# Altium PCB board.PcbDoc (part 2 of 2)
Units mm, origin at the board's own origin, x right, y up, seen from the top; angles counter-clockwise.
Board outline 96 x 40 mm, 4 copper layers (Top Layer, Mid Layer 1, Mid Layer 2, Bottom Layer), stack 1.57 mm thick; 216 components, 116 nets, 657 pads, 150 vias.
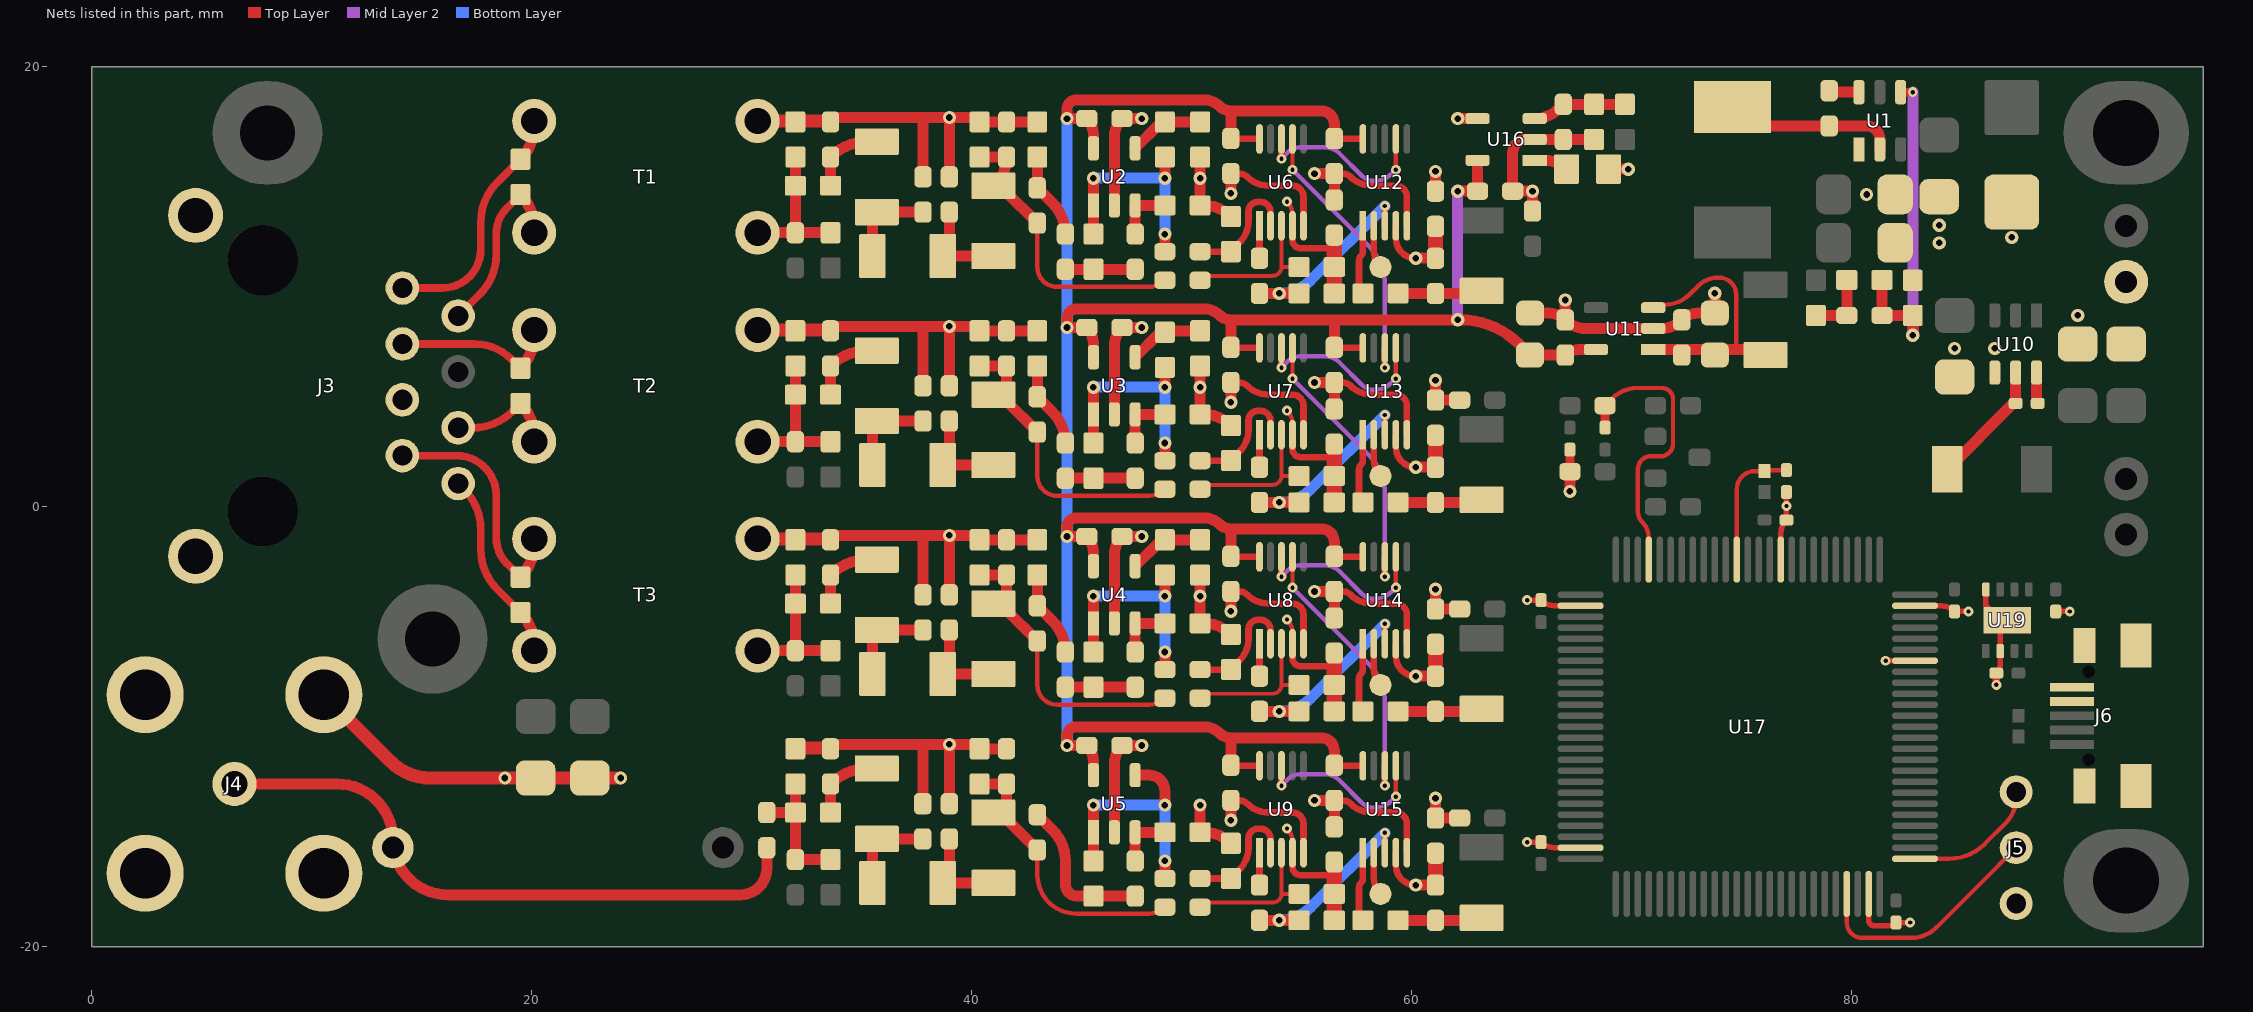
[diagram p4: the nets of this part, all layers, seen from the top]

## Via types
v1: diameter 0.6, hole 0.3, Top Layer to Bottom Layer, tented both sides, 81 vias
v2: diameter 0.45, hole 0.2, Top Layer to Bottom Layer, tented both sides, 69 vias

## Nets (pads, with @x,y where several pads share a name; then routed paths per layer and width w, separated by ;. In a path a pad name is that pad's centre, name@x,y a point inside that pad or via, vN(x,y) a via of type N, cw(c..) or ccw(c..) an arc to the next point about the centre after c; other vN are vias at no path point) (continued)
GND: C1.1 C2.1 C3.1 C11.1 C16.1 C44.1 C45.1 C46.1 C47.1 C52.2 C53.2 C54.2 C55.2 C56.1 C57.1 C58.1 C59.1 C60.1 C65.1 C66.1 C67.2 C68.2 C69.2 C70.2 C72.1 C73.1 C74.1 C75.1 C76.1 C77.1 C78.1 C79.1 C80.2 C85.2 C86.2 C87.2 C88.2 C89.1 C90.1 C91.1 C92.1 C94.1 C95.1 C96.1 C97.1 C100.1 C101.1 D1.1 J1.2 J3.5 J3.9 J3.10 J4.2 J5.3 J6.4 J6.5 J6.6 J6.7 J6.8 J6.9 L22.1 R14.2 R57.1 U1.1 U2.2 U3.2 U4.2 U5.2 U6.5 U7.5 U8.5 U9.5 U10.4 U11.2 U12.5 U13.5 U14.5 U15.5 U16.2 U17.10 U17.27 U17.49 U17.74 U17.94 U17.99 U19.2 U19.8 U19.9 | length 134.2
  Top Layer w0.25: v2(65.265,-15.242) C96.1@65.9,-15.242 ccw(c66.504,-14.638) 66.504,-15.492 U17.49@67.7,-15.492 ; v2(65.265,-4.242) C97.1@65.9,-4.242 ccw(c66.504,-3.638) 66.504,-4.492 U17.27@67.7,-4.492 ; U17.10@76.808,-2.4 76.808,-1.204 cw(c77.662,-1.204) C94.1@77.058,-0.601 v2(77.058,0.034) C101.1@77.058,0.669 ; U17.74@80.792,-17.6 80.792,-18.796 ccw(c81.038,-18.796) 81.038,-19.042 81.899,-19.042 ccw(c81.899,-18.9) C95.1@82.042,-18.9 v2(82.677,-18.9) ; v2(81.565,-7) U17.94@82.9,-7 ; U17.99@82.9,-4.508 84.096,-4.508 cw(c84.096,-5.362) C92.1@84.7,-4.758 v2(85.335,-4.758) ; U19.8@86.125,-3.758 86.125,-4.479 86.803,-5.158 U19.9@87.1,-5.158 ; C90.1@86.6,-7.558 ccw(c86.177,-7.136) 86.775,-7.136 U19.2@86.775,-6.558 U19.9@86.775,-5.483 ; C91.1@89.3,-4.758 v2(89.935,-4.758)
  Top Layer w0.3: C59.1@51.8,-13.35 52.186,-13.35 cw(c52.186,-13.847) 52.537,-13.496 ccw(c53.514,-12.519) 53.514,-13.9 54.603,-13.9 cw(c54.603,-14.397) 55.1,-14.397 U9.5@55.1,-15.725 ; C58.1@51.8,-3.85 52.186,-3.85 cw(c52.186,-4.347) 52.537,-3.996 ccw(c53.514,-3.019) 53.514,-4.4 54.603,-4.4 cw(c54.603,-4.897) 55.1,-4.897 U8.5@55.1,-6.225 ; C45.1@51.8,5.65 52.186,5.65 cw(c52.186,5.153) 52.537,5.504 ccw(c53.514,6.481) 53.514,5.1 54.603,5.1 cw(c54.603,4.603) 55.1,4.603 U7.5@55.1,3.275 ; C56.1@51.8,15.15 52.186,15.15 cw(c52.186,14.653) 52.537,15.004 ccw(c53.514,15.981) 53.514,14.6 54.603,14.6 cw(c54.603,14.103) 55.1,14.103 U6.5@55.1,12.775 ; C75.1@56.5,-13.35 56.886,-13.35 cw(c56.886,-13.847) 57.237,-13.496 ccw(c58.214,-12.519) 58.214,-13.9 59.303,-13.9 cw(c59.303,-14.397) 59.8,-14.397 U15.5@59.8,-15.725 ; C74.1@56.5,-3.85 56.886,-3.85 cw(c56.886,-4.347) 57.237,-3.996 ccw(c58.214,-3.019) 58.214,-4.4 59.303,-4.4 cw(c59.303,-4.897) 59.8,-4.897 U14.5@59.8,-6.225 ; C73.1@56.5,5.65 56.886,5.65 cw(c56.886,5.153) 57.237,5.504 ccw(c58.214,6.481) 58.214,5.1 59.303,5.1 cw(c59.303,4.603) 59.8,4.603 U13.5@59.8,3.275 ; C72.1@56.5,15.15 56.886,15.15 cw(c56.886,14.653) 57.237,15.004 ccw(c58.214,15.981) 58.214,14.6 59.303,14.6 cw(c59.303,14.103) 59.8,14.103 U12.5@59.8,12.775
  Top Layer w0.35: v2(86.6,-8.093) C90.1@86.6,-7.558
  Top Layer w0.4: C100.1@67.211,1.6 L22.1@67.211,2.6
  Top Layer w0.5: U5.2@46.5,-14.8 46.5,-11.696 cw(c47.696,-11.696) C47.1@46.85,-10.85 v1(47.75,-10.85) ; U4.2@46.5,-5.3 46.5,-2.196 cw(c47.696,-2.196) C46.1@46.85,-1.35 v1(47.75,-1.35) ; U3.2@46.5,4.2 46.5,7.304 cw(c47.696,7.304) C57.1@46.85,8.15 v1(47.75,8.15) ; U2.2@46.5,13.7 46.5,16.804 cw(c47.696,16.804) C44.1@46.85,17.65 v1(47.75,17.65) ; v1(51.8,-14.25) C59.1@51.8,-13.35 ; v1(51.8,-4.75) C58.1@51.8,-3.85 ; v1(51.8,4.75) C45.1@51.8,5.65 ; v1(51.8,14.25) C56.1@51.8,15.15 ; v1(55.6,-13.35) C75.1@56.5,-13.35 C55.2@56.5,-14.55 ; v1(55.6,-3.85) C74.1@56.5,-3.85 C54.2@56.5,-5.05 ; v1(55.6,5.65) C73.1@56.5,5.65 C53.2@56.5,4.45 ; v1(55.6,15.15) C72.1@56.5,15.15 C52.2@56.5,13.95 ; v1(61.1,-13.25) C70.2@61.1,-14.15 C88.2@62.2,-14.15 ; v1(61.1,-3.75) C69.2@61.1,-4.65 C87.2@62.2,-4.65 ; v1(61.1,5.75) C68.2@61.1,4.85 C86.2@62.2,4.85 ; C67.2@61.1,14.35 v1(61.1,15.25) ; C77.1@65.4,8.805 66.264,8.805 cw(c66.264,7.764) C79.1@67,8.5 ; C85.2@65.512,13.45 v1(65.512,14.35) C89.1@64.612,14.35 64.612,16.112 cw(c65.2,16.112) 65.2,16.7 U16.2@65.612,16.7 R57.1@68.312,16.7 ; v1(67,9.4) C79.1@67,8.5 ; v1(67.211,0.7) C100.1@67.211,1.6 ; v1(73.8,9.705) C65.1@73.8,8.805 73.036,8.805 ccw(c73.036,7.764) C66.1@72.3,8.5 cw(c71.334,9.466) 71.334,8.1 U11.2@71,8.1 67.966,8.1 cw(c67.966,9.466) C79.1@67,8.5
  Top Layer w0.6: J4.2@10.56,-8.54 13.603,-11.584 ccw(c15.399,-9.788) 15.399,-12.328 v1(18.793,-12.328) C3.1@20.193,-12.328 C2.1@22.153,-12.328 ; C2.1@22.652,-12.328 v1(24.052,-12.328)
  other v1: 84.7,7.2 86.528,7.2 90.3,8.7 84,12 87.3,12.25 84,12.8 80.7,14.2
NetC4_1: C4.1 C10.2 R7.2 R11.2 R18.2 | length 6.3
  Top Layer w0.5: C4.1@30.7,-13.9 R18.2@32,-13.9 ; R7.2@32,-12.6 R18.2@32,-13.9 ; R11.2@33.6,-16.04 C10.2@32,-16.04 R18.2@32,-13.9
NetC4_2: C4.2 J4.1 L1.2 | length 28.7
  Top Layer w0.5: J4.1@6.5,-12.6 11.16,-12.6 cw(c11.16,-15.14) 13.7,-15.14 ccw(c16.2,-15.14) 16.2,-17.64 29.5,-17.64 ccw(c29.5,-16.44) 30.7,-16.44 C4.2@30.7,-15.5
NetC5_1: C5.1 U1.6 | length 1.4
  Top Layer w0.5: C5.1@79,18.917 ccw(c79.067,18.917) 79.067,18.85 U1.6@80.35,18.85
NetC5_2: C5.2 L2.1 U1.2 | length 7.5
  Top Layer w0.5: L2.1@74.6,17.317 C5.2@79,17.317 80.7,17.317 cw(c80.7,16.717) 81.3,16.717 U1.2@81.3,16.25
NetC6_1: C6.1 R13.2 R14.1 U1.4 | length 15.4
  Top Layer w0.4: U1.4@82.25,18.85 v2@82.725,18.85
  Top Layer w0.5: R13.2@81.4,10.312 C6.1@81.4,8.7 R14.1@82.8,8.7 v1(82.8,7.8)
  Mid Layer 2 w0.5: v1(82.8,7.8) v2(82.8,18.85)
NetC6_2: C6.2 R12.2 R13.1 | length 3
  Top Layer w0.5: R12.2@78.4,8.7 C6.2@79.8,8.7 R13.1@79.8,10.312
NetC7_2: C7.2 R4.2 R8.2 R15.2 T1.4 | length 6.8
  Top Layer w0.5: T1.4@30.28,12.46 C7.2@32,12.46 ; R4.2@32,15.9 R15.2@32,14.6 C7.2@32,12.46 ; R8.2@33.6,12.46 C7.2@32,12.46
NetC8_2: C8.2 R5.2 R9.2 R16.2 T2.4 | length 6.8
  Top Layer w0.5: T2.4@30.28,2.96 C8.2@32,2.96 ; R5.2@32,6.4 R16.2@32,5.1 C8.2@32,2.96 ; R9.2@33.6,2.96 C8.2@32,2.96
NetC9_2: C9.2 R6.2 R10.2 R17.2 T3.4 | length 6.8
  Top Layer w0.5: T3.4@30.28,-6.54 C9.2@32,-6.54 ; R6.2@32,-3.1 R17.2@32,-4.4 C9.2@32,-6.54 ; R10.2@33.6,-6.54 C9.2@32,-6.54
NetC12_2: C12.2 L3.1 R15.1 | length 3.6
  Top Layer w0.5: R15.1@33.6,14.6 C12.2@33.6,15.9 cw(c35.29,14.21) 35.29,16.6 L3.1@35.7,16.6
NetC13_2: C13.2 L4.1 R16.1 | length 3.6
  Top Layer w0.5: R16.1@33.6,5.1 C13.2@33.6,6.4 cw(c35.29,4.71) 35.29,7.1 L4.1@35.7,7.1
NetC14_2: C14.2 L5.1 R17.1 | length 3.6
  Top Layer w0.5: R17.1@33.6,-4.4 C14.2@33.6,-3.1 cw(c35.29,-4.79) 35.29,-2.4 L5.1@35.7,-2.4
NetC15_2: C15.2 L6.1 R18.1 | length 3.6
  Top Layer w0.5: R18.1@33.6,-13.9 C15.2@33.6,-12.6 cw(c35.29,-14.29) 35.29,-11.9 L6.1@35.7,-11.9
NetC17_2: C17.2 L3.2 L7.1 | length 4.2
  Top Layer w0.5: L7.1@35.5,11.4 35.5,12.917 cw(c36.183,12.917) L3.2@35.7,13.4 C17.2@37.8,13.4
NetC18_2: C18.2 L4.2 L8.1 | length 4.2
  Top Layer w0.5: L8.1@35.5,1.9 35.5,3.417 cw(c36.183,3.417) L4.2@35.7,3.9 C18.2@37.8,3.9
NetC19_2: C19.2 L5.2 L9.1 | length 4.2
  Top Layer w0.5: L9.1@35.5,-7.6 35.5,-6.083 cw(c36.183,-6.083) L5.2@35.7,-5.6 C19.2@37.8,-5.6
NetC20_2: C20.2 L6.2 L10.1 | length 4.2
  Top Layer w0.5: L10.1@35.5,-17.1 35.5,-15.583 cw(c36.183,-15.583) L6.2@35.7,-15.1 C20.2@37.8,-15.1
NetC21_2: C21.2 L7.2 L11.1 | length 4.4
  Top Layer w0.5: C21.2@39,13.4 39,12.124 cw(c37.976,12.124) L7.2@38.7,11.4 L11.1@41,11.4
NetC22_2: C22.2 L8.2 L12.1 | length 4.4
  Top Layer w0.5: C22.2@39,3.9 39,2.624 cw(c37.976,2.624) L8.2@38.7,1.9 L12.1@41,1.9
NetC23_2: C23.2 L9.2 L13.1 | length 4.4
  Top Layer w0.5: C23.2@39,-5.6 39,-6.876 cw(c37.976,-6.876) L9.2@38.7,-7.6 L13.1@41,-7.6
NetC24_2: C24.2 L10.2 L14.1 | length 4.4
  Top Layer w0.5: C24.2@39,-15.1 39,-16.376 cw(c37.976,-16.376) L10.2@38.7,-17.1 L14.1@41,-17.1
NetC25_2: C25.2 C29.2 C30.2 L11.2 R19.2 | length 13.6
  Top Layer w0.2: C30.2@43,12.9 43,10.9 ccw(c43.9,10.9) 43.9,10 48.076,10 ccw(c48.076,11.024) C29.2@48.8,10.3
  Top Layer w0.5: R19.2@40.375,15.9 C25.2@41.6,15.9 41.6,15.873 cw(c39.974,15.873) L11.2@41.124,14.724 ; L11.2@41,14.6 cw(c41,13.876) L11.2@41.512,14.388 ; L11.2@41.512,14.388 C30.2@43,12.9
NetC26_2: C26.2 C31.2 C32.2 L12.2 R20.2 | length 14
  Top Layer w0.2: C32.2@43,3.4 43,1.4 ccw(c43.9,1.4) 43.9,0.5 48.076,0.5 ccw(c48.076,1.524) C31.2@48.8,0.8
  Top Layer w0.5: R20.2@40.375,6.4 C26.2@41.512,6.4 ; L12.2@41,5.1 cw(c41,4.376) 41.512,4.888 ccw(c41.299,5.101) 41.6,5.101 C26.2@41.6,6.4 ccw(c41.813,6.187) C26.2@41.512,6.187 ; L12.2@41.512,4.888 C32.2@43,3.4
NetC27_2: C27.2 C33.2 C34.2 L13.2 R21.2 | length 13.5
  Top Layer w0.2: C34.2@43,-6.1 43,-8.1 ccw(c43.9,-8.1) 43.9,-9 48.076,-9 ccw(c48.076,-7.976) C33.2@48.8,-8.7
  Top Layer w0.5: R21.2@40.375,-3.1 C27.2@41.6,-3.1 ; C27.2@41.512,-3.313 cw(c41.813,-3.313) C27.2@41.6,-3.1 ; C34.2@43,-6.1 41.512,-4.612 ccw(c41.299,-4.4) 41.6,-4.4 C27.2@41.6,-3.1
NetC28_2: C28.2 C35.2 C36.2 L14.2 R22.2 | length 12.9
  Top Layer w0.2: C36.2@43,-15.6 43,-16.725 ccw(c44.775,-16.725) 44.775,-18.5 48.076,-18.5 ccw(c48.076,-17.476) C35.2@48.8,-18.2
  Top Layer w0.5: R22.2@40.375,-12.6 C28.2@41.6,-12.6 41.6,-13.9 cw(c41.299,-13.9) 41.512,-14.112 C36.2@43,-15.6
NetC29_1: C29.1 R44.2 U6.3 | length 6.7
  Top Layer w0.18: C29.1@50.4,10.3 cw(c50.6,10.3) 50.6,10.5 53.694,10.5 ccw(c53.694,10.906) 54.1,10.9 ; U6.3@54.1,12.775 54.1,10.906 cw(c53.694,10.906) 54.1,10.9 ; R44.2@54.9,10.9 54.1,10.9
NetC30_1: C30.1 C37.2 R26.2 | length 3.9
  Top Layer w0.5: R26.2@43,15.9 C30.1@43,14.5 43.692,13.809 cw(c42.283,12.4) C37.2@44.275,12.4
NetC31_1: C31.1 R45.2 U7.3 | length 6.7
  Top Layer w0.18: C31.1@50.4,0.8 cw(c50.6,0.8) 50.6,1 53.694,1 ccw(c53.694,1.406) 54.1,1.4 ; U7.3@54.1,3.275 54.1,1.406 cw(c53.694,1.406) 54.1,1.4 ; R45.2@54.9,1.4 54.1,1.4
NetC32_1: C32.1 C38.2 R27.2 | length 3.9
  Top Layer w0.5: R27.2@43,6.4 C32.1@43,5 43.692,4.309 cw(c42.283,2.9) C38.2@44.275,2.9
NetC33_1: C33.1 R46.2 U8.3 | length 6.7
  Top Layer w0.18: C33.1@50.4,-8.7 cw(c50.6,-8.7) 50.6,-8.5 53.694,-8.5 ccw(c53.694,-8.094) 54.1,-8.1 ; U8.3@54.1,-6.225 54.1,-8.094 cw(c53.694,-8.094) 54.1,-8.1 ; R46.2@54.9,-8.1 54.1,-8.1
NetC34_1: C34.1 C39.2 R28.2 | length 3.9
  Top Layer w0.5: R28.2@43,-3.1 C34.1@43,-4.5 43.692,-5.191 cw(c42.283,-6.6) C39.2@44.275,-6.6
NetC35_1: C35.1 R47.2 U9.3 | length 6.7
  Top Layer w0.18: C35.1@50.4,-18.2 cw(c50.6,-18.2) 50.6,-18 53.694,-18 ccw(c53.694,-17.594) 54.1,-17.6 ; U9.3@54.1,-15.725 54.1,-17.594 cw(c53.694,-17.594) 54.1,-17.6 ; R47.2@54.9,-17.6 54.1,-17.6
NetC36_1: C36.1 C43.2 R32.2 | length 7.1
  Top Layer w0.5: C36.1@43,-14 43.692,-14.691 cw(c42.283,-16.1) 44.275,-16.1 44.275,-17.163 ccw(c44.813,-17.163) 44.813,-17.7 R32.2@45.55,-17.7 C43.2@47.45,-17.7
NetC37_1: C37.1 C40.2 R29.2 | length 3.2
  Top Layer w0.5: C37.1@44.275,10.8 C40.2@47.45,10.8
NetC38_1: C38.1 C41.2 R30.2 | length 3.2
  Top Layer w0.5: C38.1@44.275,1.3 C41.2@47.45,1.3
NetC39_1: C39.1 C42.2 R31.2 | length 3.2
  Top Layer w0.5: C39.1@44.275,-8.2 C42.2@47.45,-8.2
NetC40_1: C40.1 R34.2 U2.3 | length 2.6
  Top Layer w0.5: C40.1@47.45,12.4 U2.3@47.45,13.7 R34.2@48.8,13.7
NetC41_1: C41.1 R36.2 U3.3 | length 2.6
  Top Layer w0.5: C41.1@47.45,2.9 U3.3@47.45,4.2 R36.2@48.8,4.2
NetC42_1: C42.1 R38.2 U4.3 | length 2.6
  Top Layer w0.5: C42.1@47.45,-6.6 U4.3@47.45,-5.3 R38.2@48.8,-5.3
NetC43_1: C43.1 R39.2 U5.3 | length 2.6
  Top Layer w0.5: C43.1@47.45,-16.1 U5.3@47.45,-14.8 R39.2@48.8,-14.8
NetC48_1: C48.1 R40.2 U6.2 | length 6.2
  Top Layer w0.3: C48.1@50.4,11.6 51.2,11.6 ; R40.2@51.8,11.6 51.2,11.6 ; U6.2@53.6,12.775 53.6,13.401 ccw(c53.142,13.401) 53.142,13.86 53.03,13.86 ccw(c53.03,13.43) 52.6,13.43 52.6,13 cw(c51.2,13) 51.2,11.6
NetC48_2: C48.2 R29.1 R33.1 U2.1 | length 10
  Top Layer w0.5: R29.1@45.55,12.4 U2.1@45.55,13.7 v1(45.55,14.939) ; C48.2@48.8,11.6 v1(48.8,12.4) ; v1(48.8,14.939) R33.1@48.8,15.839
  Bottom Layer w0.5: v1(45.55,14.939) v1(48.8,14.939) v1(48.8,12.4)
NetC49_1: C49.1 R41.2 U7.2 | length 6.2
  Top Layer w0.3: C49.1@50.4,2.1 51.2,2.1 ; R41.2@51.8,2.1 51.2,2.1 ; U7.2@53.6,3.275 53.6,3.901 ccw(c53.142,3.901) 53.142,4.36 53.03,4.36 ccw(c53.03,3.93) 52.6,3.93 52.6,3.5 cw(c51.2,3.5) 51.2,2.1
NetC49_2: C49.2 R30.1 R35.1 U3.1 | length 12.6
  Top Layer w0.5: C49.2@48.8,2.1 v1(48.8,2.9) ; v1(48.8,5.439) R35.1@48.8,6.339 ; U3.1@45.55,4.2 R30.1@45.55,2.9 U3.1@45.55,4.2 ; U3.1@45.55,4.2 v1(45.55,5.439) U3.1@45.55,4.2
  Bottom Layer w0.5: v1(45.55,5.439) v1(48.8,5.439) v1(48.8,2.9)
NetC50_1: C50.1 R42.2 U8.2 | length 6.2
  Top Layer w0.3: C50.1@50.4,-7.4 51.2,-7.4 ; R42.2@51.8,-7.4 51.2,-7.4 ; U8.2@53.6,-6.225 53.6,-5.599 ccw(c53.142,-5.599) 53.142,-5.14 53.03,-5.14 ccw(c53.03,-5.57) 52.6,-5.57 52.6,-6 cw(c51.2,-6) 51.2,-7.4
NetC50_2: C50.2 R31.1 R37.1 U4.1 | length 10
  Top Layer w0.5: R31.1@45.55,-6.6 U4.1@45.55,-5.3 v1(45.55,-4.061) ; C50.2@48.8,-7.4 v1(48.8,-6.6) ; v1(48.8,-4.061) R37.1@48.8,-3.161
  Bottom Layer w0.5: v1(45.55,-4.061) v1(48.8,-4.061) v1(48.8,-6.6)
NetC51_1: C51.1 R43.2 U9.2 | length 6.2
  Top Layer w0.3: C51.1@50.4,-16.9 51.2,-16.9 ; R43.2@51.8,-16.9 51.2,-16.9 ; U9.2@53.6,-15.725 53.6,-15.099 ccw(c53.142,-15.099) 53.142,-14.64 53.03,-14.64 ccw(c53.03,-15.07) 52.6,-15.07 52.6,-15.5 cw(c51.2,-15.5) 51.2,-16.9
NetC51_2: C51.2 R32.1 U5.1 U5.4 | length 11.5
  Top Layer w0.5: R32.1@45.55,-16.1 U5.1@45.55,-14.8 v1(45.55,-13.561) ; U5.4@47.45,-12.2 48.085,-12.2 cw(c48.085,-12.915) 48.8,-12.915 v1(48.8,-13.561) ; C51.2@48.8,-16.9 v1(48.8,-16.1)
  Bottom Layer w0.5: v1(45.55,-13.561) v1(48.8,-13.561) v1(48.8,-16.1)
NetC61_1: C61.1 R48.2 U12.3 | length 9.1
  Top Layer w0.3: U12.3@58.8,12.775 v2(58.8,13.675)
  Top Layer w0.5: C61.1@53.1,9.7 v1(54,9.7) R48.2@54.9,9.7
  Bottom Layer w0.5: v1(54,9.7) ccw(c54,11.692) 55.408,10.283 v2(58.8,13.675)
NetC61_2: C61.2 U6.1 | length 1.5
  Top Layer w0.3: C61.2@53.1,11.3 U6.1@53.1,12.775
NetC62_1: C62.1 R49.2 U13.3 | length 9.1
  Top Layer w0.3: U13.3@58.8,3.275 v2(58.8,4.175)
  Top Layer w0.5: C62.1@53.1,0.2 v1(54,0.2) R49.2@54.9,0.2
  Bottom Layer w0.5: v1(54,0.2) ccw(c54,2.192) 55.408,0.783 v2(58.8,4.175)
NetC62_2: C62.2 U7.1 | length 1.5
  Top Layer w0.3: C62.2@53.1,1.8 U7.1@53.1,3.275
NetC63_1: C63.1 R50.2 U14.3 | length 9.1
  Top Layer w0.3: U14.3@58.8,-6.225 v2(58.8,-5.325)
  Top Layer w0.5: C63.1@53.1,-9.3 v1(54,-9.3) R50.2@54.9,-9.3
  Bottom Layer w0.5: v1(54,-9.3) ccw(c54,-7.308) 55.408,-8.717 v2(58.8,-5.325)
NetC63_2: C63.2 U8.1 | length 1.5
  Top Layer w0.3: C63.2@53.1,-7.7 U8.1@53.1,-6.225
NetC64_1: C64.1 R51.2 U15.3 | length 9.1
  Top Layer w0.3: U15.3@58.8,-15.725 v2(58.8,-14.825)
  Top Layer w0.5: C64.1@53.1,-18.8 v1(54,-18.8) R51.2@54.9,-18.8
  Bottom Layer w0.5: v1(54,-18.8) ccw(c54,-16.808) 55.408,-18.217 v2(58.8,-14.825)
NetC64_2: C64.2 U9.1 | length 1.5
  Top Layer w0.3: C64.2@53.1,-17.2 U9.1@53.1,-15.725
NetC65_2: C65.2 C66.2 L15.2 U11.1 U11.3 | length 12.2
  Top Layer w0.2: U11.3@71.084,9.186 71.513,9.186 ccw(c71.513,10.812) 72.662,9.662 73.053,10.053 cw(c73.93,9.177) 73.93,10.417 74.005,10.417 cw(c74.005,9.652) 74.77,9.652 74.77,7.15
  Top Layer w0.5: U11.1@71,7.15 72.3,7.15 73.8,7.15 74.77,7.15 75.85,7.15 L15.2@76.1,6.9
NetC71_1: C71.1 U10.6 | length 1.4
  Top Layer w0.5: U10.6@88.428,6.1 88.428,4.821 ccw(c88.599,4.821) C71.1@88.478,4.7
NetC71_2: C71.2 L16.1 U10.5 | length 5.7
  Top Layer w0.5: L16.1@84.372,1.7 87.297,4.625 cw(c87.478,4.444) C71.2@87.478,4.7 U10.5@87.478,6.1
NetC80_1: C80.1 R56.1 R57.2 U16.3 | length 4
  Top Layer w0.5: U16.3@65.612,17.65 ccw(c65.612,19.219) C80.1@66.722,18.11 ; C80.1@66.912,18.3 R57.2@68.312,18.3 R56.1@69.712,18.3
NetC81_1: C81.1 L17.1 R52.1 | length 3.8
  Top Layer w0.5: R52.1@59.4,9.7 62.917,9.7 ccw(c62.917,10.1) L17.1@63.2,9.817
NetC82_1: C82.1 L18.1 R53.1 | length 3.8
  Top Layer w0.5: R53.1@59.4,0.2 62.917,0.2 ccw(c62.917,0.6) L18.1@63.2,0.317
NetC83_1: C83.1 L19.1 R54.1 | length 3.8
  Top Layer w0.5: R54.1@59.4,-9.3 62.917,-9.3 ccw(c62.917,-8.9) L19.1@63.2,-9.183
NetC84_1: C84.1 L20.1 R55.1 | length 3.8
  Top Layer w0.5: R55.1@59.4,-18.8 62.917,-18.8 ccw(c62.917,-18.4) L20.1@63.2,-18.683
NetC99_2: C99.2 L21.2 U17.22 | length 13.2
  Top Layer w0.2: C99.2@68.811,4.6 69.135,4.924 cw(c70.284,3.774) 70.284,5.4 71.4,5.4 cw(c71.4,4.9) 71.9,4.9 71.9,2.862 cw(c71.338,2.862) 71.338,2.3 70.892,2.3 ccw(c70.892,1.713) 70.305,1.713 70.305,-0.23 ccw(c70.97,-0.23) 70.499,-0.699 ; 70.5,-0.7 cw(c69.776,-1.424) 70.8,-1.424 U17.22@70.8,-2.4
  Top Layer w0.4: L21.2@68.811,3.6 C99.2@68.811,4.6
NetC101_2: C101.2 R60.2 U17.14 | length 5.9
  Top Layer w0.2: U17.14@74.8,-2.4 74.8,0.8 cw(c75.622,0.8) 75.622,1.622 R60.2@76.058,1.622 ; R60.2@76.058,1.669 C101.2@77.058,1.669
NetJ3_1: J3.1 R1.2 T1.1 | length 11
  Top Layer w0.35: J3.1@14.13,9.945 15.934,9.945 ccw(c15.934,11.711) 17.7,11.711 17.7,12.948 cw(c20.24,12.948) 18.444,14.744 R1.2@19.5,15.8
  Top Layer w0.5: R1.2@19.5,15.8 ccw(c18.003,17.297) T1.1@20.12,17.297
NetJ3_2: J3.2 R1.1 T1.3 | length 8.2
  Top Layer w0.35: J3.2@16.67,8.675 17.656,9.661 ccw(c15.86,11.457) 18.4,11.457 18.4,12.4 cw(c20.09,12.4) 18.895,13.595 R1.1@19.5,14.2
  Top Layer w0.5: R1.1@19.5,14.2 cw(c18.003,12.703) T1.3@20.12,12.703
NetJ3_3: J3.3 R2.2 T2.1 | length 7.4
  Top Layer w0.35: J3.3@14.13,7.405 17.4,7.405 cw(c17.4,5.003) 19.099,6.701 R2.2@19.5,6.3
  Top Layer w0.5: R2.2@19.5,6.3 ccw(c18.003,7.797) T2.1@20.12,7.797
NetJ3_6: J3.6 R2.1 T2.3 | length 4.8
  Top Layer w0.35: J3.6@16.67,3.595 17.343,3.595 ccw(c17.343,6.135) 19.139,4.339 R2.1@19.5,4.7
  Top Layer w0.5: R2.1@19.5,4.7 cw(c18.003,3.203) T2.3@20.12,3.203
NetJ3_7: J3.7 R3.2 T3.1 | length 11.1
  Top Layer w0.35: J3.7@14.13,2.325 16.601,2.325 cw(c16.601,0.526) 18.4,0.526 18.4,-1.4 ccw(c20.09,-1.4) 18.895,-2.595 R3.2@19.5,-3.2
  Top Layer w0.5: R3.2@19.5,-3.2 ccw(c18.003,-1.703) T3.1@20.12,-1.703
NetJ3_8: J3.8 R3.1 T3.3 | length 8.5
  Top Layer w0.35: J3.8@16.67,1.055 16.956,0.769 cw(c15.16,-1.027) 17.7,-1.027 17.7,-1.948 ccw(c20.24,-1.948) 18.444,-3.744 R3.1@19.5,-4.8
  Top Layer w0.5: R3.1@19.5,-4.8 cw(c18.003,-6.297) T3.3@20.12,-6.297
NetR23_1: R23.1 R33.2 U2.4 | length 3.4
  Top Layer w0.5: U2.4@47.45,16.3 48.544,17.394 cw(c48.8,17.138) R33.2@48.8,17.5 R23.1@50.4,17.5
NetR24_1: R24.1 R35.2 U3.4 | length 3.4
  Top Layer w0.5: U3.4@47.45,6.8 48.544,7.894 cw(c48.8,7.638) 48.8,8 R24.1@50.4,8
NetR25_1: R25.1 R37.2 U4.4 | length 3.4
  Top Layer w0.5: U4.4@47.45,-2.7 48.544,-1.606 cw(c48.8,-1.862) R37.2@48.8,-1.5 R25.1@50.4,-1.5
NetR52_2: R52.2 U12.1 | length 3.2
  Top Layer w0.3: R52.2@57.8,9.7 cw(c58.23,10.13) 57.622,10.13 57.622,11.165 cw(c57.998,11.165) 57.732,11.431 ccw(c57.568,11.595) 57.8,11.595 U12.1@57.8,12.775
NetR53_2: R53.2 U13.1 | length 3.2
  Top Layer w0.3: R53.2@57.8,0.2 cw(c58.23,0.63) 57.622,0.63 57.622,1.665 cw(c57.998,1.665) 57.732,1.931 ccw(c57.568,2.095) 57.8,2.095 U13.1@57.8,3.275
NetR54_2: R54.2 U14.1 | length 3.2
  Top Layer w0.3: R54.2@57.8,-9.3 cw(c58.23,-8.87) 57.622,-8.87 57.622,-7.835 cw(c57.998,-7.835) 57.732,-7.569 ccw(c57.568,-7.405) 57.8,-7.405 U14.1@57.8,-6.225
NetR55_2: R55.2 U15.1 | length 3.2
  Top Layer w0.3: R55.2@57.8,-18.8 cw(c58.23,-18.37) 57.622,-18.37 57.622,-17.335 cw(c57.998,-17.335) 57.732,-17.069 ccw(c57.568,-16.905) 57.8,-16.905 U15.1@57.8,-15.725
NetR58_2: R58.2 U16.1 | length 1.6
  Top Layer w0.5: U16.1@65.612,15.75 66.094,15.75 cw(c66.094,14.384) R58.2@67.06,15.35
NetTP1_1: TP1.1 U12.2 | length 2
  Top Layer w0.3: U12.2@58.3,12.775 58.3,11.624 ccw(c59.324,11.624) TP1.1@58.6,10.9
NetTP2_1: TP2.1 U13.2 | length 2
  Top Layer w0.3: U13.2@58.3,3.275 58.3,2.124 ccw(c59.324,2.124) TP2.1@58.6,1.4
NetTP3_1: TP3.1 U14.2 | length 2
  Top Layer w0.3: U14.2@58.3,-6.225 58.3,-7.376 ccw(c59.324,-7.376) TP3.1@58.6,-8.1
NetTP4_1: TP4.1 U15.2 | length 2
  Top Layer w0.3: U15.2@58.3,-15.725 58.3,-16.876 ccw(c59.324,-16.876) TP4.1@58.6,-17.6
NetU6_7: U6.7 U13.8 | length 12.9
  Top Layer w0.2: v2(54.6,15.325) U6.7@54.6,16.725
  Top Layer w0.3: v2(58.8,6.325) U13.8@58.8,7.225
  Mid Layer 2 w0.2: v2(54.6,15.325) 58.056,11.869 cw(c56.26,10.073) 58.8,10.073 v2(58.8,6.325)
NetU6_8: U6.8 U12.7 | length 8.4
  Top Layer w0.2: v2(59.3,15.325) U12.7@59.3,16.725
  Top Layer w0.3: v2(54.1,15.825) U6.8@54.1,16.725
  Mid Layer 2 w0.2: v2(54.1,15.825) 54.414,16.139 cw(c54.899,15.654) 54.899,16.34 56.071,16.34 cw(c56.071,15.401) 56.735,16.065 57.749,15.051 ccw(c58.31,15.611) 58.31,14.818 ccw(c58.31,15.985) 59.135,15.16 v2(59.3,15.325)
NetU7_7: U7.7 U14.8 | length 12.9
  Top Layer w0.2: v2(54.6,5.825) U7.7@54.6,7.225
  Top Layer w0.3: v2(58.8,-3.175) U14.8@58.8,-2.275
  Mid Layer 2 w0.2: v2(54.6,5.825) 58.056,2.369 cw(c56.26,0.573) 58.8,0.573 v2(58.8,-3.175)
NetU7_8: U7.8 U13.7 | length 8.4
  Top Layer w0.2: v2(59.3,5.825) U13.7@59.3,7.225
  Top Layer w0.3: v2(54.1,6.325) U7.8@54.1,7.225
  Mid Layer 2 w0.2: v2(54.1,6.325) 54.414,6.639 cw(c54.899,6.154) 54.899,6.84 56.071,6.84 cw(c56.071,5.901) 56.735,6.565 57.749,5.551 ccw(c58.31,6.111) 58.31,5.318 ccw(c58.31,6.485) 59.135,5.66 v2(59.3,5.825)
NetU8_7: U8.7 U15.8 | length 12.9
  Top Layer w0.2: v2(54.6,-3.675) U8.7@54.6,-2.275
  Top Layer w0.3: v2(58.8,-12.675) U15.8@58.8,-11.775
  Mid Layer 2 w0.2: v2(54.6,-3.675) 58.056,-7.131 cw(c56.26,-8.927) 58.8,-8.927 v2(58.8,-12.675)
NetU8_8: U8.8 U14.7 | length 8.4
  Top Layer w0.2: v2(59.3,-3.675) U14.7@59.3,-2.275
  Top Layer w0.3: v2(54.1,-3.175) U8.8@54.1,-2.275
  Mid Layer 2 w0.2: v2(54.1,-3.175) 54.414,-2.861 cw(c54.899,-3.346) 54.899,-2.66 56.071,-2.66 cw(c56.071,-3.599) 56.735,-2.935 57.749,-3.949 ccw(c58.31,-3.389) 58.31,-4.182 ccw(c58.31,-3.015) 59.135,-3.84 v2(59.3,-3.675)
NetU9_8: U9.8 U15.7 | length 8.4
  Top Layer w0.2: v2(59.3,-13.175) U15.7@59.3,-11.775
  Top Layer w0.3: v2(54.1,-12.675) U9.8@54.1,-11.775
  Mid Layer 2 w0.2: v2(54.1,-12.675) 54.414,-12.361 cw(c54.899,-12.846) 54.899,-12.16 56.071,-12.16 cw(c56.071,-13.099) 56.735,-12.435 57.749,-13.449 ccw(c58.31,-12.889) 58.31,-13.682 ccw(c58.31,-12.515) 59.135,-13.34 v2(59.3,-13.175)
SWCLK: J5.1 U17.76 | length 6.2
  Top Layer w0.2: U17.76@82.9,-16 84.459,-16 ccw(c84.459,-13.727) 86.066,-15.334 87.024,-14.376 ccw(c85.874,-13.227) 87.5,-13.227 J5.1@87.5,-12.96
SWDIO: J5.2 U17.72 | length 11
  Top Layer w0.2: U17.72@79.8,-17.6 79.8,-18.9 ccw(c80.5,-18.9) 80.5,-19.6 82.727,-19.6 ccw(c82.727,-17.974) 83.876,-19.124 86.674,-16.326 ; J5.2@87.5,-15.5 86.676,-16.324 ; 86.674,-16.326 ccw(c85.527,-15.174) 86.676,-16.324 ; 86.674,-16.326 86.676,-16.324
VDD: C44.2 C45.2 C46.2 C47.2 C56.2 C57.2 C58.2 C59.2 C72.2 C73.2 C74.2 C75.2 C77.2 C79.2 C89.2 U2.5 U3.5 U4.5 U5.5 U6.10 U7.10 U8.10 U9.10 U11.5 U12.10 U13.10 U14.10 U15.10 U16.5 | length 129.9
  Top Layer w0.3: C59.2@51.8,-11.75 ccw(c51.861,-11.689) 51.861,-11.775 U9.10@53.1,-11.775 ; C58.2@51.8,-2.25 ccw(c51.861,-2.189) 51.861,-2.275 U8.10@53.1,-2.275 ; C45.2@51.8,7.25 ccw(c51.861,7.311) 51.861,7.225 U7.10@53.1,7.225 ; C56.2@51.8,16.75 ccw(c51.861,16.811) 51.861,16.725 U6.10@53.1,16.725 ; C75.2@56.5,-11.75 ccw(c56.561,-11.689) 56.561,-11.775 U15.10@57.8,-11.775 ; C74.2@56.5,-2.25 ccw(c56.561,-2.189) 56.561,-2.275 U14.10@57.8,-2.275 ; C73.2@56.5,7.25 ccw(c56.561,7.311) 56.561,7.225 U13.10@57.8,7.225 ; C72.2@56.5,16.75 ccw(c56.561,16.811) 56.561,16.725 U12.10@57.8,16.725
  Top Layer w0.5: U5.5@45.55,-12.2 45.55,-11.574 ccw(c44.526,-11.574) C47.2@45.25,-10.85 v1(44.35,-10.85) 44.35,-10.424 cw(c44.774,-10.424) 44.774,-10 50.576,-10 cw(c50.576,-11.024) 51.3,-10.3 ccw(c51.783,-9.817) 51.783,-10.5 51.8,-10.5 ; U4.5@45.55,-2.7 45.55,-2.074 ccw(c44.526,-2.074) C46.2@45.25,-1.35 v1(44.35,-1.35) 44.35,-0.924 cw(c44.774,-0.924) 44.774,-0.5 50.576,-0.5 cw(c50.576,-1.524) 51.3,-0.8 ccw(c51.783,-0.317) 51.783,-1 51.8,-1 ; U3.5@45.55,6.8 45.55,7.426 ccw(c44.526,7.426) C57.2@45.25,8.15 v1(44.35,8.15) 44.35,8.576 cw(c44.774,8.576) 44.774,9 50.576,9 cw(c50.576,7.976) 51.3,8.7 ccw(c51.783,9.183) 51.783,8.5 51.8,8.5 ; U2.5@45.55,16.3 45.55,16.926 ccw(c44.526,16.926) C44.2@45.25,17.65 v1(44.35,17.65) 44.35,18.076 cw(c44.774,18.076) 44.774,18.5 50.576,18.5 cw(c50.576,17.476) 51.3,18.2 ccw(c51.783,18.683) 51.783,18 51.8,18 ; C59.2@51.8,-11.75 51.8,-10.5 ; C58.2@51.8,-2.25 51.8,-1 ; C45.2@51.8,7.25 51.8,8.5 ; C56.2@51.8,16.75 51.8,18 ; C75.2@56.5,-11.75 56.5,-11.1 ccw(c55.9,-11.1) 55.9,-10.5 51.8,-10.5 ; C74.2@56.5,-2.25 56.5,-1.6 ccw(c55.9,-1.6) 55.9,-1 51.8,-1 ; C73.2@56.5,7.25 56.5,8.5 ; C72.2@56.5,16.75 56.5,17.4 ccw(c55.9,17.4) 55.9,18 51.8,18 ; v1(62.112,14.35) C89.2@63.012,14.35 U16.5@63.012,15.75 ; U11.5@68.4,7.15 67.604,7.15 ccw(c67.604,6.296) C79.2@67,6.9 C77.2@65.4,6.9 64.914,7.385 ccw(c62.224,4.695) 62.224,8.5 v1(62.112,8.5) 56.5,8.5 ; 51.8,8.5 56.5,8.5
  Mid Layer 2 w0.5: v1(62.112,8.5) v1(62.112,14.35)
  Bottom Layer w0.5: v1(44.35,-10.85) v1(44.35,-1.35) v1(44.35,8.15) v1(44.35,17.65)
VGND: C12.1 C13.1 C14.1 C15.1 C17.1 C18.1 C19.1 C20.1 C21.1 C22.1 C23.1 C24.1 C25.1 C26.1 C27.1 C28.1 C52.1 C53.1 C54.1 C55.1 C67.1 C68.1 C69.1 C70.1 C81.2 C82.2 C83.2 C84.2 R4.1 R5.1 R6.1 R7.1 R19.1 R20.1 R21.1 R22.1 R23.2 R24.2 R25.2 R26.1 R27.1 R28.1 R34.1 R36.1 R38.1 R39.1 R40.1 R41.1 R42.1 R43.1 R44.1 R45.1 R46.1 R47.1 R48.1 R49.1 R50.1 R51.1 R58.1 T1.6 T2.6 T3.6 U6.4 U7.4 U8.4 U9.4 U12.4 U13.4 U14.4 U15.4 U16.4 | length 129.2
  Top Layer w0.2: v2(54.35,-14.625) cw(c53.746,-15.229) 54.6,-15.229 U9.4@54.6,-15.725 ; v2(54.35,-5.125) cw(c53.746,-5.729) 54.6,-5.729 U8.4@54.6,-6.225 ; v2(54.35,4.375) cw(c53.746,3.771) 54.6,3.771 U7.4@54.6,3.275 ; v2(54.35,13.875) cw(c53.746,13.271) 54.6,13.271 U6.4@54.6,12.775
  Top Layer w0.3: U9.4@54.6,-15.725 54.6,-16.366 ccw(c54.984,-16.366) 54.984,-16.75 56.5,-16.75 ; U8.4@54.6,-6.225 54.6,-6.866 ccw(c54.984,-6.866) 54.984,-7.25 56.5,-7.25 ; U7.4@54.6,3.275 54.6,2.634 ccw(c54.984,2.634) 54.984,2.25 56.5,2.25 ; U6.4@54.6,12.775 54.6,12.134 ccw(c54.984,12.134) 54.984,11.75 56.5,11.75 ; U15.4@59.3,-15.725 59.3,-16.3 ccw(c60.2,-16.3) v1(60.2,-17.2) ; U14.4@59.3,-6.225 59.3,-6.8 ccw(c60.2,-6.8) v1(60.2,-7.7) ; U13.4@59.3,3.275 59.3,2.7 ccw(c60.2,2.7) v1(60.2,1.8) ; U12.4@59.3,12.775 59.3,12.2 ccw(c60.2,12.2) v1(60.2,11.3) ; C84.2@61.1,-16.75 C84.2@61.2,-16.75 ; C83.2@61.1,-7.25 C83.2@61.2,-7.25 ; C82.2@61.1,2.25 C82.2@61.2,2.25 ; C81.2@61.1,11.75 C81.2@61.2,11.75
  Top Layer w0.4: C15.1@33.504,-10.96 cw(c33.504,-11.096) C15.1@33.6,-11 ; C14.1@33.504,-1.46 cw(c33.504,-1.596) C14.1@33.6,-1.5 ; C13.1@33.504,8.04 cw(c33.504,7.904) C13.1@33.6,8 ; C12.1@33.504,17.54 cw(c33.504,17.404) C12.1@33.6,17.5
  Top Layer w0.5: C15.1@33.6,-10.8 37.8,-10.8 ; C14.1@33.6,-1.3 37.8,-1.3 ; C13.1@33.6,8.2 37.8,8.2 ; C12.1@33.6,17.7 37.8,17.7 ; C20.1@37.8,-13.5 37.8,-10.8 ; C19.1@37.8,-4 37.8,-1.3 ; C18.1@37.8,5.5 37.8,8.2 ; C17.1@37.8,15 37.8,17.7 ; C24.1@39,-13.5 v1(39,-10.8) ; C23.1@39,-4 v1(39,-1.3) ; C22.1@39,5.5 v1(39,8.2) ; C21.1@39,15 v1(39,17.7) ; R22.1@40.375,-11 C28.1@41.6,-11 ; R22.1@40.375,-10.8 v1(39,-10.8) ; R21.1@40.375,-1.5 R28.1@43,-1.5 ; R21.1@40.375,-1.3 v1(39,-1.3) ; R20.1@40.375,8 C26.1@41.6,8 R27.1@43,8 ; R20.1@40.375,8.2 v1(39,8.2) ; R19.1@40.375,17.5 R26.1@43,17.5 ; R19.1@40.375,17.7 v1(39,17.7) ; v1(50.4,-13.561) R39.1@50.4,-14.8 50.593,-14.8 cw(c50.593,-16.507) R43.1@51.8,-15.3 ; R25.2@50.4,-3.1 v1(50.4,-4.061) R38.1@50.4,-5.3 50.593,-5.3 cw(c50.593,-7.007) R42.1@51.8,-5.8 ; R24.2@50.4,6.4 v1(50.4,5.439) R36.1@50.4,4.2 50.593,4.2 cw(c50.593,2.493) R41.1@51.8,3.7 ; R23.2@50.4,15.9 v1(50.4,14.939) R34.1@50.4,13.7 50.593,13.7 cw(c50.593,11.993) R40.1@51.8,13.2 ; v1(60.2,-17.2) C84.2@61.1,-17.2 ; v1(60.2,-7.7) C83.2@61.1,-7.7 ; v1(60.2,1.8) C82.2@61.1,1.8 ; v1(60.2,11.3) C81.2@61.1,11.3 ; v1(62.112,17.65) U16.4@63.012,17.65 ; R58.1@68.965,15.35 v1(69.865,15.35) ; 37.8,-10.8 v1(39,-10.8) ; 37.8,-1.3 v1(39,-1.3) ; 37.8,8.2 v1(39,8.2) ; 37.8,17.7 v1(39,17.7)
  Top Layer w0.6: T3.6@30.28,-1.46 C14.1@33.504,-1.46 ; T2.6@30.28,8.04 C13.1@33.504,8.04 ; T1.6@30.28,17.54 C12.1@33.504,17.54 ; R7.1@32,-10.96 C15.1@33.504,-10.96
  Top Layer w0.7: R51.1@56.5,-18.8 R47.1@56.5,-17.6 C55.1@56.5,-16.15 ; R50.1@56.5,-9.3 R46.1@56.5,-8.1 C54.1@56.5,-6.65 ; R49.1@56.5,0.2 R45.1@56.5,1.4 C53.1@56.5,2.85 ; R48.1@56.5,9.7 R44.1@56.5,10.9 C52.1@56.5,12.35 ; C84.2@61.1,-17.2 61.1,-16.75 C70.1@61.1,-15.75 ; C83.2@61.1,-7.7 61.1,-7.25 C69.1@61.1,-6.25 ; C82.2@61.1,1.8 61.1,2.25 C68.1@61.1,3.25 ; C81.2@61.1,11.3 61.1,11.75 C67.1@61.1,12.75
pads on no net: J3. J6. U1.5 U11.4 U17.1 U17.2 U17.3 U17.4 U17.5 U17.7 U17.8 U17.9 U17.12 U17.13 U17.15 U17.16 U17.17 U17.18 U17.34 U17.35 U17.36 U17.37 U17.38 U17.39 U17.40 U17.41 U17.42 U17.43 U17.44 U17.45 U17.46 U17.47 U17.48 U17.51 U17.52 U17.53 U17.54 U17.55 U17.56 U17.57 U17.58 U17.59 U17.60 U17.61 U17.62 U17.63 U17.64 U17.65 U17.66 U17.67 U17.68 U17.69 U17.73 U17.77 U17.78 U17.79 U17.80 U17.83 U17.84 U17.85 U17.86 U17.87 U17.88 U17.89 U17.90 U17.91 U17.92 U17.93 U17.95 U17.96 U17.97 U17.98

## Polygon pours and split planes (outlines as drawn)
5V on Bottom Layer "NONET_L02_P-001" (solid, remove dead copper, pour order 1): -2.8,24.3 -2.8,-23.5 99.7,-23.5 99.7,24.3
VGND on Bottom Layer "NONET_L02_P-001" (solid, remove dead copper, pour order 0): 71.2,-2.5 71.2,-11.3 cw(c64.7,-11.3) 64.7,-17.8 62.925,-17.8 54.65,-17.8 46.1,-17.8 cw(c46.1,-9.8) 38.1,-9.8 38.1,17.174 cw(c39.726,17.174) 39.726,18.8 65.2,18.8 cw(c65.2,12.8) 71.2,12.8
GND on Top Layer "NONET_L02_P-001" (solid, remove dead copper, pour order 5): 69.3,-2.4 ccw(c69.3,-4) 67.7,-4 67.7,-16 ccw(c69.3,-16) 69.3,-17.6 81.3,-17.6 ccw(c81.3,-16) 82.9,-16 82.9,-4 ccw(c81.3,-4) 81.3,-2.4
GND on Top Layer "NONET_L02_P-001" (solid, remove dead copper, pour order 4): 79.6,21.9 79.6,6.626 ccw(c81.226,6.626) 81.226,5 96.9,5 96.9,11.3 92.5,11.3 cw(c92.5,12.024) 91.988,11.512 88.176,15.324 ccw(c87.027,14.174) 87.027,15.8 84.826,15.8 cw(c84.826,17.426) 83.2,17.426 83.2,21.9
GND on Top Layer "NONET_L02_P-001" (solid, remove dead copper, pour order 3): 89.3,-4.3 ccw(c89.3,-4.9) 88.7,-4.9 88.7,-12.8 ccw(c90,-12.8) 90,-14.1 97,-14.1 97,-4.3
GND on Mid Layer 2 "NONET_L02_P-001" (solid, remove dead copper, pour order 8): 26,22 26,-22.2 -2,-22.2 -2,22
5V on Mid Layer 2 "NONET_L02_P-001" (solid, remove dead copper, pour order 7): 66.2,23 66.2,1.5 98.5,1.5 98.5,23
VGND on Mid Layer 2 "NONET_L02_P-001" (solid, remove dead copper, pour order 6): 26.4,21.8 26.4,-23 65.865,-23 65.865,21.8
3V3 on Mid Layer 2 "NONET_L02_P-001" (solid, remove dead copper, pour order 2): 70.8,5.4 ccw(c70.8,-1) 64.4,-1 64.4,-7.75 64.4,-20.9 97.6,-20.9 97.8,5.4 91.526,5.4 cw(c91.526,7.026) 89.9,7.026 89.9,10.1 ccw(c88.4,10.1) 88.4,11.6 ccw(c88.4,10.1) 86.9,10.1 86.9,7.026 cw(c85.274,7.026) 85.274,5.4
GND on Mid Layer 1 (split plane): 95.49,-19.49 0.51,-19.49 0.51,19.49 95.49,19.49

## Keep-outs
Keep-Out Layer:
  the board outline again, w0

## Other copper
Top Layer:
  rectangle net NetC26_2: 40.1,5.2 41.9,6.5
  rectangle net NetC31_1: 54.05,1.11 55.1,1.8
  rectangle net NetC27_2: 40.1,-4.3 41.9,-3
  rectangle net NetC33_1: 54.05,-8.39 55.1,-7.7
  rectangle net NetC35_1: 54.05,-17.89 55.1,-17.2
  rectangle net NetC28_2: 40.1,-13.8 41.9,-12.5
  rectangle net NetC25_2: 40.1,14.7 41.9,16
  rectangle net NetC29_1: 54.05,10.61 55.1,11.3
  pour cut-out: 90.802,-12.025 91.249,-12.025 ccw(c91.249,-11.7) 91.574,-11.7 91.574,-11.2 90.802,-11.2
  pour cut-out: 90.802,-6.975 91.249,-6.975 cw(c91.249,-7.301) 91.574,-7.301 91.574,-7.801 90.802,-7.801

## Dimensions
0,-20 to 0,20 on Mechanical 1
0,-20 to 96,-20 on Mechanical 1